# Altium PCB Template, LCO EuroCard 220mm.PCBDOC
Units mm, origin at the board's own origin, x right, y up, seen from the top; angles counter-clockwise.
Board outline 220 x 100 mm, 6 copper layers (TopLayer, MidLayer1, MidLayer2, InternalPlane1, InternalPlane2, BottomLayer); 7 components, 0 nets, 489 pads, 0 vias.
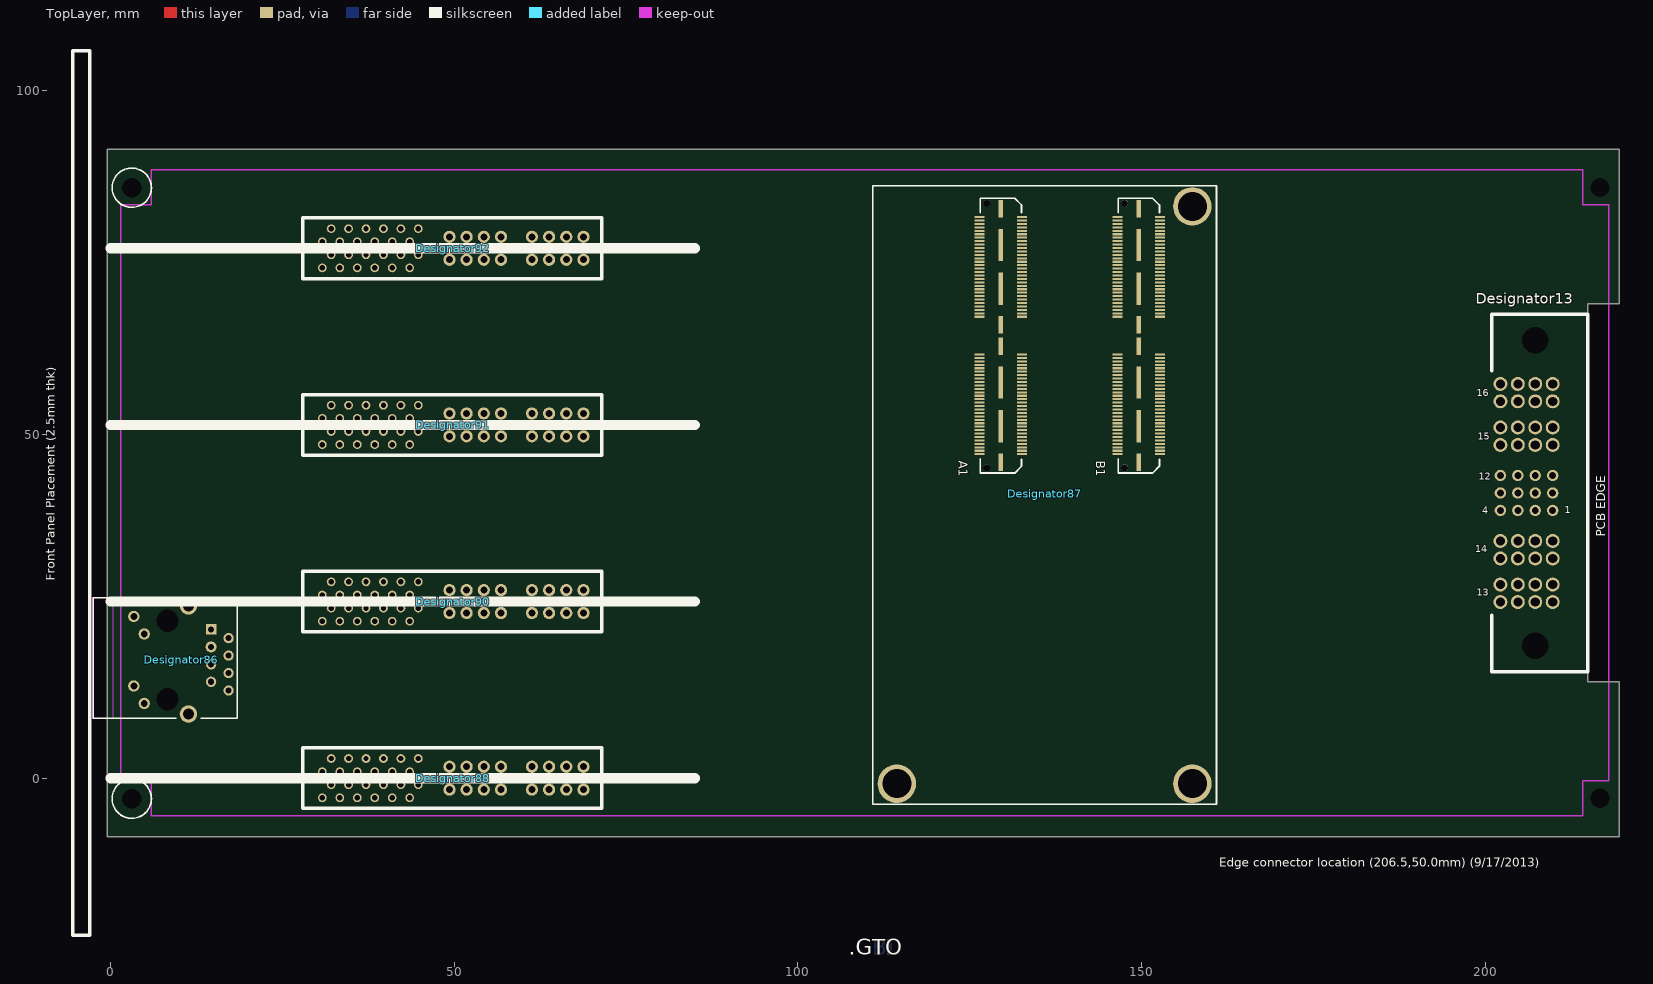
[diagram p0: TopLayer view]
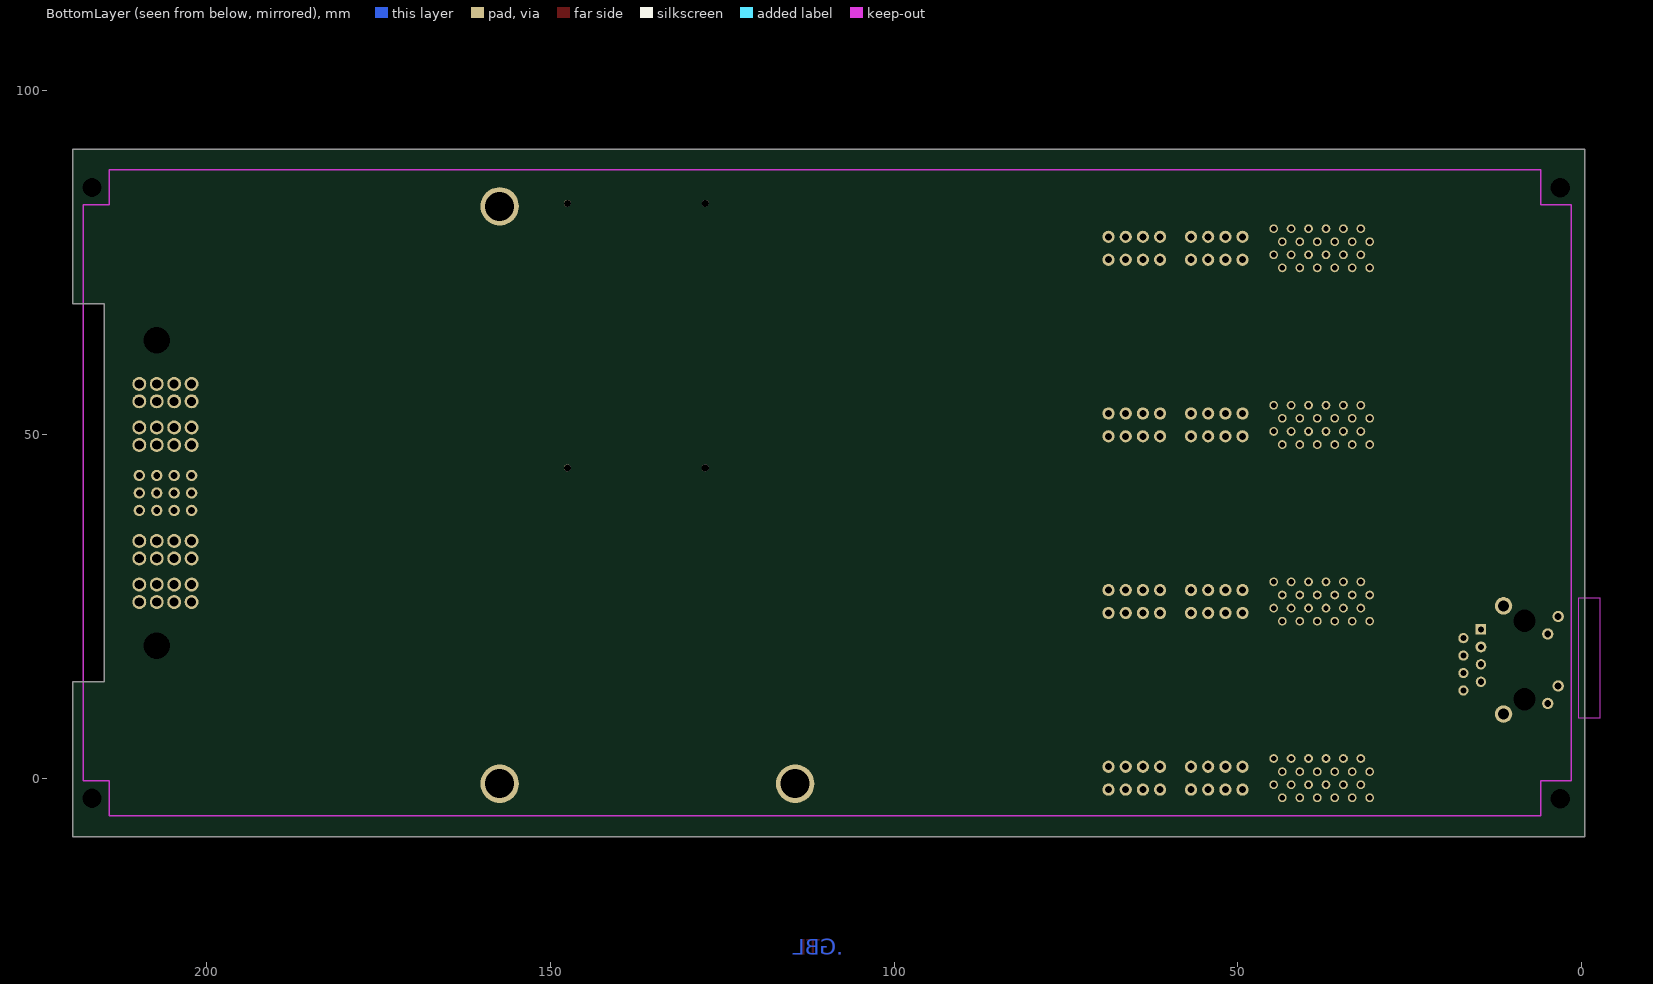
[diagram p1: BottomLayer view, seen from below]
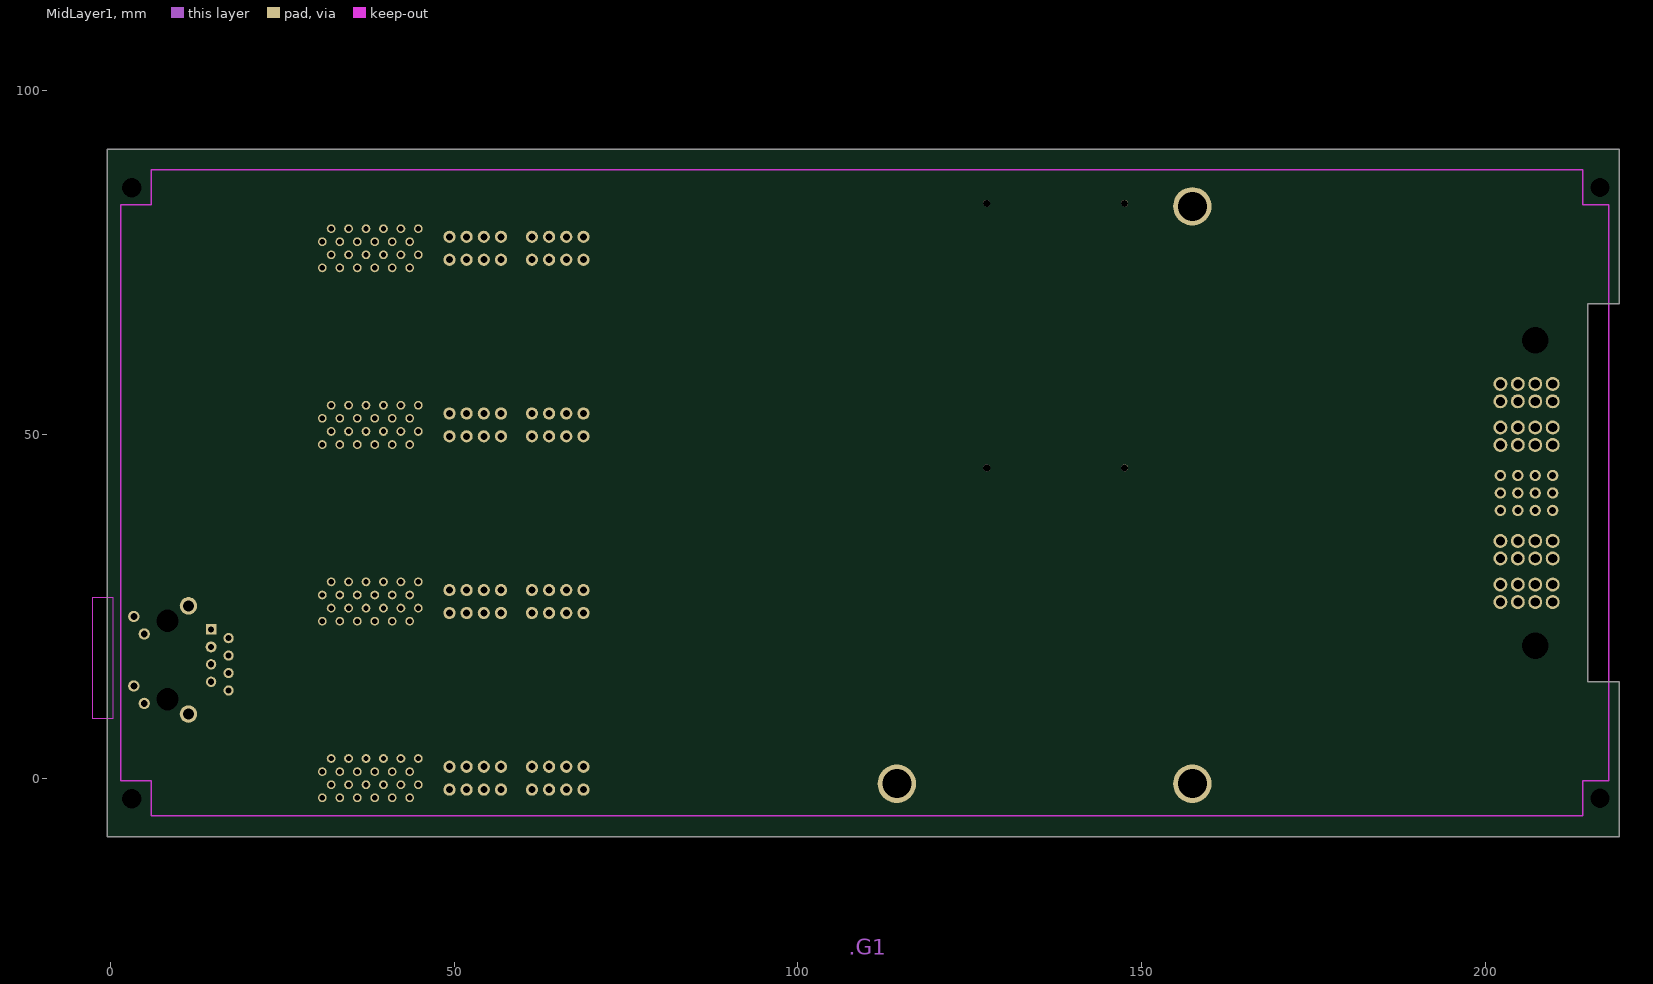
[diagram p2: MidLayer1]
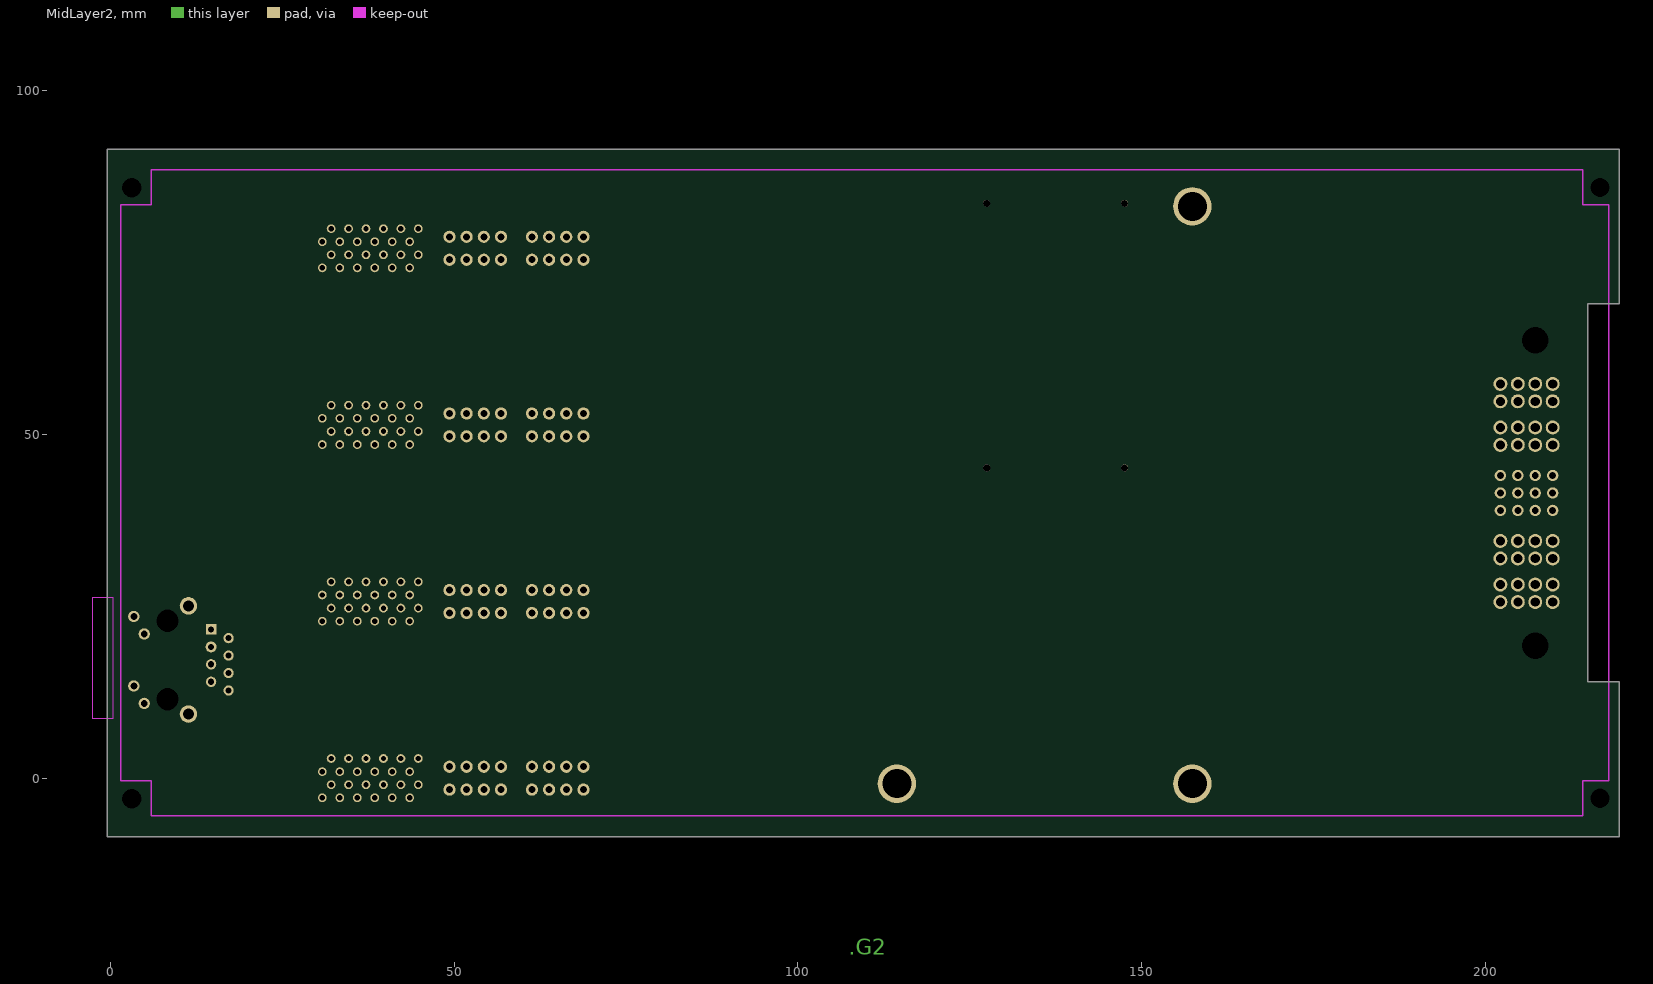
[diagram p3: MidLayer2]
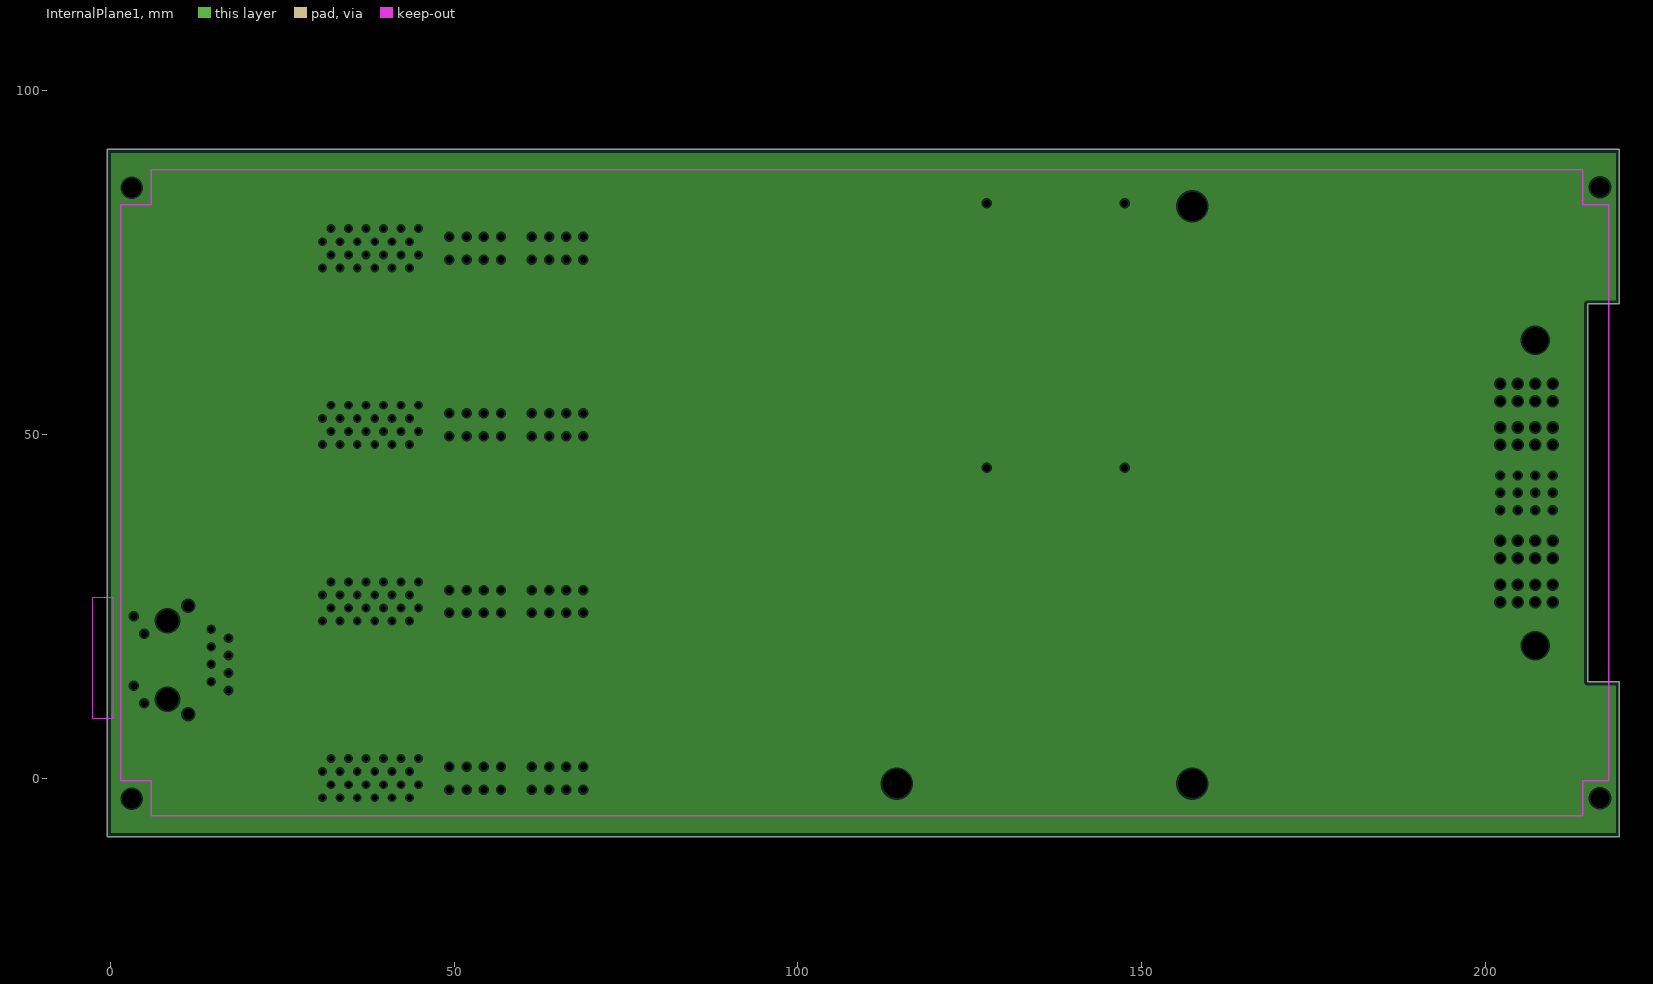
[diagram p4: InternalPlane1, clearances drawn from the general rule]
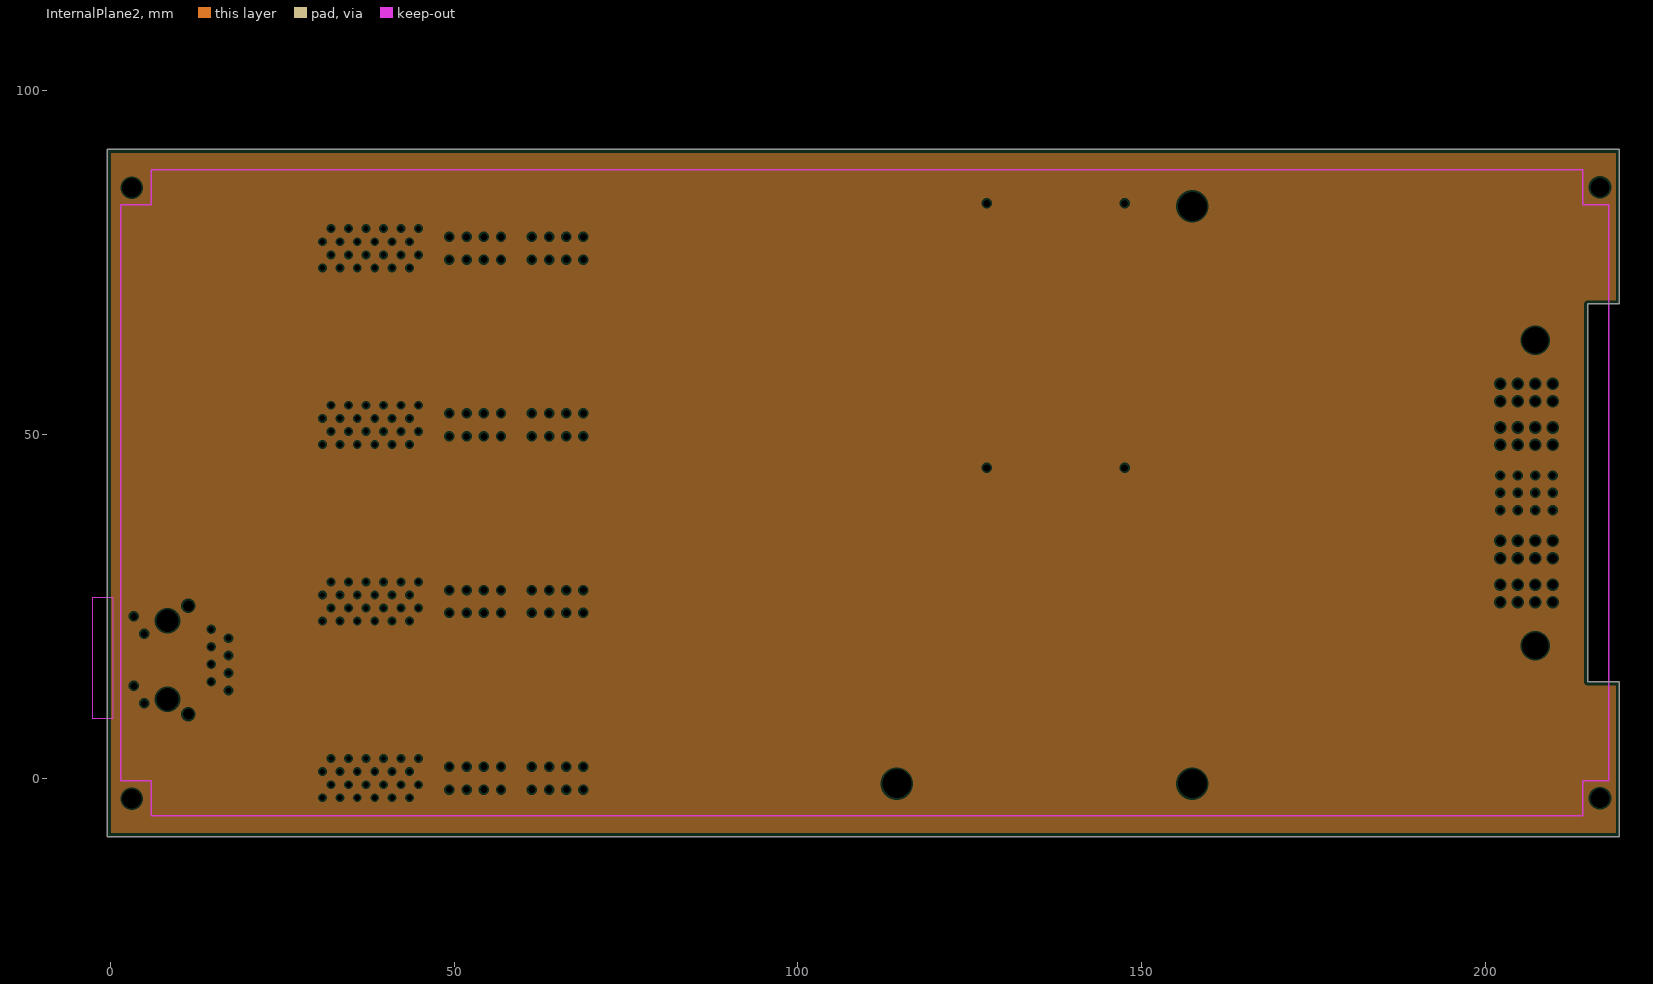
[diagram p5: InternalPlane2, clearances drawn from the general rule]

## Layer stack, top to bottom
TopLayer: signal copper 0.0356
Dielectric: core 0.32, FR-4, Dk 4.8
MidLayer1: signal copper 0.0356
Dielectric: prepreg 0.32, FR-4, Dk 4.8
MidLayer2: signal copper 0.0356
Dielectric: core 0.32, FR-4, Dk 4.8
InternalPlane1: plane copper 0.0356
Dielectric: prepreg 0.32, FR-4, Dk 4.8
InternalPlane2: plane copper 0.0356
Dielectric: core 0.32, FR-4, Dk 4.8
BottomLayer: signal copper 0.0356

## Board outline
-0.46,-8.5 -0.46,91.5 219.54,91.5 219.54,69 214.94,69 214.94,14 219.54,14 219.54,-8.5

## Design rules (kind name [scope] priority, off if disabled: settings)
Clearance [All] p1: gap=0.254
FabricationTestPointUsage TestPointUsage [All] p1: valid=0 allowmultiple=FALSE
FabricationTestpoint Testpoint [All] p1: side=3 testpointundercomponent=TRUE minsize=1.016 maxsize=2.54 preferedsize=1.524 minholesize=0.508 maxholesize=1.016 preferedholesize=0.813 testpointgrid=0.025 allowsidetop=TRUE allowsidebottom=TRUE usegrid=TRUE gridtolerance=0
PlaneClearance [All] p1: clearance=0.254
PlaneConnect [All] p1: planeconnectstyle=Relief reliefexpansion=0.508 reliefentries=4 reliefconductorwidth=0.254 reliefairgap=0.254
PolygonConnect [All] p1: connectstyle=Relief reliefconductorwidth=0.254 reliefentries=4 polygonreliefangle="90 Angle"
RoutingVias [All] p1: holewidth=0.711 width=1.27 viastyle="Through Hole" minholewidth=0.711 minwidth=1.27 maxholewidth=0.711 maxwidth=1.27
SilkscreenOverComponentPads [All] p1: minsilkscreentomaskgap=0.254
SolderMaskExpansion [All] p1: expansion=0.051
Width [All] p1: maxlimit=0.254 minlimit=0.254 preferedwidth=0.254
23 further rules are at their usual default settings.

## Components (designator, comment, footprint, x,y, rotation, side; value= is the part's Value field where it differs from the comment)
Designator13 "Comment" PETC-02-12-02-01-RA 206.04,41.5 r0 top
Designator86 "Comment" "RJ-45 W/MAGNETICS" 8.29,22.915 r90 top
Designator87 "Comment" "SuperFin Footprint" 114.42,83.19 r270 top
Designator88 "Comment" "MOLEX 46114 SERIES" 49.825,0 r180 top
Designator90 "Comment" "MOLEX 46114 SERIES" 49.825,25.7 r180 top
Designator91 "Comment" "MOLEX 46114 SERIES" 49.825,51.4 r180 top
Designator92 "Comment" "MOLEX 46114 SERIES" 49.825,77.1 r180 top

## Footprints (in the part's own frame and the unit in brackets; to place one, negate y for a bottom-side part, rotate by r counter-clockwise, add the part's x,y. Pads: shape width x height; smd on the part's side, far side on the other; paste and mask are expansions set on the pad)
"MOLEX 46114 SERIES" [mil] "VERT MOUNT PCB"
  round 50 hole 31 unplated paste-6 mask-3.5: 1(747.86,112.5) 2(697.86,37.5) 3(647.86,112.5) 4(597.86,37.5) 5(547.86,112.5) 6(497.86,37.5) 7(447.86,112.5) 8(397.86,37.5) 9(347.86,112.5) 10(297.86,37.5) 11(247.86,112.5) 12(197.86,37.5) 13(747.86,-37.5) 14(697.86,-112.5) 15(647.86,-37.5) 16(597.86,-112.5) 17(547.86,-37.5) 18(497.86,-112.5) 19(447.86,-37.5) 20(397.86,-112.5) 21(347.86,-37.5) 22(297.86,-112.5) 23(247.86,-37.5) 24(197.86,-112.5)
  round 70 hole 40 unplated paste-6 mask-3.5: P1(-275.42,65.5) P1(-176.99,65.5) P1(-78.57,65.5) P1(19.86,65.5) P2(-747.86,65.5) P2(-649.43,65.5) P2(-551.01,65.5) P2(-452.58,65.5) P3(-275.42,-65.6) P3(-176.99,-65.6) P3(-78.57,-65.6) P3(19.86,-65.6) P4(-747.86,-65.6) P4(-649.43,-65.6) P4(-551.01,-65.6) P4(-452.58,-65.6)
  silkscreen extent -851,-174 860,173
PETC-02-12-02-01-RA [mil] "Samtec Male Pins, PWR(4), Signal(12), Right Angle"
  round 59.06 hole 150 unplated: 0(50,-875) 0(50,875)
  round 65 hole 40: 1(150,-100) 2(50,-100) 3(-50,-100) 4(-150,-100) 5(150,0) 6(50,0) 7(-50,0) 8(-150,0) 9(150,100) 10(50,100) 11(-50,100) 12(-150,100)
  round 80 hole 52: 13(-150,-625) 13(-150,-525) 13(-50,-625) 13(-50,-525) 13(50,-625) 13(50,-525) 13(150,-625) 13(150,-525) 14(-150,-375) 14(-150,-275) 14(-50,-375) 14(-50,-275) 14(50,-375) 14(50,-275) 14(150,-375) 14(150,-275) 15(-150,275) 15(-150,375) 15(-50,275) 15(-50,375) 15(50,275) 15(50,375) 15(150,275) 15(150,375) 16(-150,525) 16(-150,625) 16(-50,525) 16(-50,625) 16(50,525) 16(50,625) 16(150,525) 16(150,625)
  silkscreen extent -200,-1025 350,1025
"RJ-45 W/MAGNETICS" [mm] "Conn, Pulse Eng p/n J0011D01BNL"
  rect 1.5x1.5 hole 0.9: 1(-1.27,-6.35)
  round 1.5 hole 0.9: 2(-2.54,-8.89) 4(-5.08,-8.89) 5(-6.35,-6.35) 6(-7.62,-8.89) 7(-8.89,-6.35) 8(-10.16,-8.89)
  round 1.6 hole 0.9: 3(-3.81,-6.35)
  round 1.651 hole 1.016: 9(0.61,4.902) 10(-1.93,3.378) 11(-9.5,4.902) 12(-12.04,3.378)
  round 2.54 hole 1.6: 13(2.159,-3.048) 14(-13.589,-3.048)
  round 2.95 hole 3.25 unplated: MH1(0,0) MH2(-11.43,0)
  KeepOutLayer region: -14.224,7.874 3.302,7.874 3.302,10.922 -14.224,10.922
  silkscreen extent -14.22,-10.16 3.3,10.79
"SuperFin Footprint" [mm] "SAMTEC QTH-060-01-L-D-A (x2)"
  round 5.6 hole 4.22: 0(0,43) 0(84,43) 0(84,0)
  round 1 hole 1.02 unplated: 0(38.04,33.15) 0(38.04,13.08) 1(-0.44,33.15) 1(-0.44,13.08)
  rect 0.3x1.45 smd paste+0 mask+0.05: A1(36.05,12.03) A2(36.05,18.21) A3(35.55,12.03) A4(35.55,18.21) A5(35.05,12.03) A6(35.05,18.21) A7(34.55,12.03) A8(34.55,18.21) A9(34.05,12.03) A10(34.05,18.21) A11(33.55,12.03) A12(33.55,18.21) A13(33.05,12.03) A14(33.05,18.21) A15(32.55,12.03) A16(32.55,18.21) A17(32.05,12.03) A18(32.05,18.21) A19(31.55,12.03) A20(31.55,18.21) A21(31.05,12.03) A22(31.05,18.21) A23(30.55,12.03) A24(30.55,18.21) A25(30.05,12.03) A26(30.05,18.21) A27(29.55,12.03) A28(29.55,18.21) A29(29.05,12.03) A30(29.05,18.21) A31(28.55,12.03) A32(28.55,18.21) A33(28.05,12.03) A34(28.05,18.21) A35(27.55,12.03) A36(27.55,18.21) A37(27.05,12.03) A38(27.05,18.21) A39(26.55,12.03) A40(26.55,18.21) A41(26.05,12.03) A42(26.05,18.21) A43(25.55,12.03) A44(25.55,18.21) A45(25.05,12.03) A46(25.05,18.21) A47(24.55,12.03) A48(24.55,18.21) A49(24.05,12.03) A50(24.05,18.21) A51(23.55,12.03) A52(23.55,18.21) A53(23.05,12.03) A54(23.05,18.21) A55(22.55,12.03) A56(22.55,18.21) A57(22.05,12.03) A58(22.05,18.21) A59(21.55,12.03) A60(21.55,18.21) A61(16.05,12.03) A62(16.05,18.21) A63(15.55,12.03) A64(15.55,18.21) A65(15.05,12.03) A66(15.05,18.21) A67(14.55,12.03) A68(14.55,18.21) A69(14.05,12.03) A70(14.05,18.21) A71(13.55,12.03) A72(13.55,18.21) A73(13.05,12.03) A74(13.05,18.21) A75(12.55,12.03) A76(12.55,18.21) A77(12.05,12.03) A78(12.05,18.21) A79(11.55,12.03) A80(11.55,18.21) A81(11.05,12.03) A82(11.05,18.21) A83(10.55,12.03) A84(10.55,18.21) A85(10.05,12.03) A86(10.05,18.21) A87(9.55,12.03) A88(9.55,18.21) A89(9.05,12.03) A90(9.05,18.21) A91(8.55,12.03) A92(8.55,18.21) A93(8.05,12.03) A94(8.05,18.21) A95(7.55,12.03) A96(7.55,18.21) A97(7.05,12.03) A98(7.05,18.21) A99(6.55,12.03) A100(6.55,18.21) A101(6.05,12.03) A102(6.05,18.21) A103(5.55,12.03) A104(5.55,18.21) A105(5.05,12.03) A106(5.05,18.21) A107(4.55,12.03) A108(4.55,18.21) A109(4.05,12.03) A110(4.05,18.21) A111(3.55,12.03) A112(3.55,18.21) A113(3.05,12.03) A114(3.05,18.21) A115(2.55,12.03) A116(2.55,18.21) A117(2.05,12.03) A118(2.05,18.21) A119(1.55,12.03) A120(1.55,18.21) B1(36.05,32.1) B2(36.05,38.28) B3(35.55,32.1) B4(35.55,38.28) B5(35.05,32.1) B6(35.05,38.28) B7(34.55,32.1) B8(34.55,38.28) B9(34.05,32.1) B10(34.05,38.28) B11(33.55,32.1) B12(33.55,38.28) B13(33.05,32.1) B14(33.05,38.28) B15(32.55,32.1) B16(32.55,38.28) B17(32.05,32.1) B18(32.05,38.28) B19(31.55,32.1) B20(31.55,38.28) B21(31.05,32.1) B22(31.05,38.28) B23(30.55,32.1) B24(30.55,38.28) B25(30.05,32.1) B26(30.05,38.28) B27(29.55,32.1) B28(29.55,38.28) B29(29.05,32.1) B30(29.05,38.28) B31(28.55,32.1) B32(28.55,38.28) B33(28.05,32.1) B34(28.05,38.28) B35(27.55,32.1) B36(27.55,38.28) B37(27.05,32.1) B38(27.05,38.28) B39(26.55,32.1) B40(26.55,38.28) B41(26.05,32.1) B42(26.05,38.28) B43(25.55,32.1) B44(25.55,38.28) B45(25.05,32.1) B46(25.05,38.28) B47(24.55,32.1) B48(24.55,38.28) B49(24.05,32.1) B50(24.05,38.28) B51(23.55,32.1) B52(23.55,38.28) B53(23.05,32.1) B54(23.05,38.28) B55(22.55,32.1) B56(22.55,38.28) B57(22.05,32.1) B58(22.05,38.28) B59(21.55,32.1) B60(21.55,38.28) B61(16.05,32.1) B62(16.05,38.28) B63(15.55,32.1) B64(15.55,38.28) B65(15.05,32.1) B66(15.05,38.28) B67(14.55,32.1) B68(14.55,38.28) B69(14.05,32.1) B70(14.05,38.28) B71(13.55,32.1) B72(13.55,38.28) B73(13.05,32.1) B74(13.05,38.28) B75(12.55,32.1) B76(12.55,38.28) B77(12.05,32.1) B78(12.05,38.28) B79(11.55,32.1) B80(11.55,38.28) B81(11.05,32.1) B82(11.05,38.28) B83(10.55,32.1) B84(10.55,38.28) B85(10.05,32.1) B86(10.05,38.28) B87(9.55,32.1) B88(9.55,38.28) B89(9.05,32.1) B90(9.05,38.28) B91(8.55,32.1) B92(8.55,38.28) B93(8.05,32.1) B94(8.05,38.28) B95(7.55,32.1) B96(7.55,38.28) B97(7.05,32.1) B98(7.05,38.28) B99(6.55,32.1) B100(6.55,38.28) B101(6.05,32.1) B102(6.05,38.28) B103(5.55,32.1) B104(5.55,38.28) B105(5.05,32.1) B106(5.05,38.28) B107(4.55,32.1) B108(4.55,38.28) B109(4.05,32.1) B110(4.05,38.28) B111(3.55,32.1) B112(3.55,38.28) B113(3.05,32.1) B114(3.05,38.28) B115(2.55,32.1) B116(2.55,38.28) B117(2.05,32.1) B118(2.05,38.28) B119(1.55,32.1) B120(1.55,38.28)
  rect 2.54x0.64 smd: A121(20.355,15.12) A121(37.245,15.12) A122(0.355,15.12) A122(17.245,15.12) B121(20.355,35.19) B121(37.245,35.19) B122(0.355,35.19) B122(17.245,35.19)
  rect 4.7x0.64 smd: A121(25.625,15.12) A121(31.975,15.12) A122(5.625,15.12) A122(11.975,15.12) B121(25.625,35.19) B121(31.975,35.19) B122(5.625,35.19) B122(11.975,35.19)
  silkscreen extent -3,-3.5 87,46.5

## Free pads (board coordinates)
  round 1.27 hole 2.794 unplated: 1(3.096,85.912) 2(3.096,-2.988) 2(216.735,-2.937) 2(216.735,85.963)

## Nets (pads, with @x,y where several pads share a name; then routed paths per layer and width w, separated by ;. In a path a pad name is that pad's centre, name@x,y a point inside that pad or via, vN(x,y) a via of type N, cw(c..) or ccw(c..) an arc to the next point about the centre after c; other vN are vias at no path point)
pads on no net: Designator13.0 Designator13.1 Designator13.2 Designator13.3 Designator13.4 Designator13.5 Designator13.6 Designator13.7 Designator13.8 Designator13.9 Designator13.10 Designator13.11 Designator13.12 Designator13.13 Designator13.14 Designator13.15 Designator13.16 Designator86.1 Designator86.2 Designator86.3 Designator86.4 Designator86.5 Designator86.6 Designator86.7 Designator86.8 Designator86.9 Designator86.10 Designator86.11 Designator86.12 Designator86.13 Designator86.14 Designator86.MH1 Designator86.MH2 Designator87.0 Designator87.1 Designator87.A1 Designator87.A2 Designator87.A3 Designator87.A4 Designator87.A5 Designator87.A6 Designator87.A7 Designator87.A8 Designator87.A9 Designator87.A10 Designator87.A11 Designator87.A12 Designator87.A13 Designator87.A14 Designator87.A15 Designator87.A16 Designator87.A17 Designator87.A18 Designator87.A19 Designator87.A20 Designator87.A21 Designator87.A22 Designator87.A23 Designator87.A24 Designator87.A25 Designator87.A26 Designator87.A27 Designator87.A28 Designator87.A29 Designator87.A30 Designator87.A31 Designator87.A32 Designator87.A33 Designator87.A34 Designator87.A35 Designator87.A36 Designator87.A37 Designator87.A38 Designator87.A39 Designator87.A40 Designator87.A41 Designator87.A42 Designator87.A43 Designator87.A44 Designator87.A45 Designator87.A46 Designator87.A47 Designator87.A48 Designator87.A49 Designator87.A50 Designator87.A51 Designator87.A52 Designator87.A53 Designator87.A54 Designator87.A55 Designator87.A56 Designator87.A57 Designator87.A58 Designator87.A59 Designator87.A60 Designator87.A61 Designator87.A62 Designator87.A63 Designator87.A64 Designator87.A65 Designator87.A66 Designator87.A67 Designator87.A68 Designator87.A69 Designator87.A70 Designator87.A71 Designator87.A72 Designator87.A73 Designator87.A74 Designator87.A75 Designator87.A76 Designator87.A77 Designator87.A78 Designator87.A79 Designator87.A80 Designator87.A81 Designator87.A82 Designator87.A83 Designator87.A84 Designator87.A85 Designator87.A86 Designator87.A87 Designator87.A88 Designator87.A89 Designator87.A90 Designator87.A91 Designator87.A92 Designator87.A93 Designator87.A94 Designator87.A95 Designator87.A96 Designator87.A97 Designator87.A98 Designator87.A99 Designator87.A100 Designator87.A101 Designator87.A102 Designator87.A103 Designator87.A104 Designator87.A105 Designator87.A106 Designator87.A107 Designator87.A108 Designator87.A109 Designator87.A110 Designator87.A111 Designator87.A112 Designator87.A113 Designator87.A114 Designator87.A115 Designator87.A116 Designator87.A117 Designator87.A118 Designator87.A119 Designator87.A120 Designator87.A121 Designator87.A122 Designator87.B1 Designator87.B2 Designator87.B3 Designator87.B4 Designator87.B5 Designator87.B6 Designator87.B7 Designator87.B8 Designator87.B9 Designator87.B10 Designator87.B11 Designator87.B12 Designator87.B13 Designator87.B14 Designator87.B15 Designator87.B16 Designator87.B17 Designator87.B18 Designator87.B19 Designator87.B20 Designator87.B21 Designator87.B22 Designator87.B23 Designator87.B24 Designator87.B25 Designator87.B26 Designator87.B27 Designator87.B28 Designator87.B29 Designator87.B30 Designator87.B31 Designator87.B32 Designator87.B33 Designator87.B34 Designator87.B35 Designator87.B36 Designator87.B37 Designator87.B38 Designator87.B39 Designator87.B40 Designator87.B41 Designator87.B42 Designator87.B43 Designator87.B44 Designator87.B45 Designator87.B46 Designator87.B47 Designator87.B48 Designator87.B49 Designator87.B50 Designator87.B51 Designator87.B52 Designator87.B53 Designator87.B54 Designator87.B55 Designator87.B56 Designator87.B57 Designator87.B58 Designator87.B59 Designator87.B60 Designator87.B61 Designator87.B62 Designator87.B63 Designator87.B64 Designator87.B65 Designator87.B66 Designator87.B67 Designator87.B68 Designator87.B69 Designator87.B70 Designator87.B71 Designator87.B72 Designator87.B73 Designator87.B74 Designator87.B75 Designator87.B76 Designator87.B77 Designator87.B78 Designator87.B79 Designator87.B80 Designator87.B81 Designator87.B82 Designator87.B83 Designator87.B84 Designator87.B85 Designator87.B86 Designator87.B87 Designator87.B88 Designator87.B89 Designator87.B90 Designator87.B91 Designator87.B92 Designator87.B93 Designator87.B94 Designator87.B95 Designator87.B96 Designator87.B97 Designator87.B98 Designator87.B99 Designator87.B100 Designator87.B101 Designator87.B102 Designator87.B103 Designator87.B104 Designator87.B105 Designator87.B106 Designator87.B107 Designator87.B108 Designator87.B109 Designator87.B110 Designator87.B111 Designator87.B112 Designator87.B113 Designator87.B114 Designator87.B115 Designator87.B116 Designator87.B117 Designator87.B118 Designator87.B119 Designator87.B120 Designator87.B121 Designator87.B122 Designator88.1 Designator88.2 Designator88.3 Designator88.4 Designator88.5 Designator88.6 Designator88.7 Designator88.8 Designator88.9 Designator88.10 Designator88.11 Designator88.12 Designator88.13 Designator88.14 Designator88.15 Designator88.16 Designator88.17 Designator88.18 Designator88.19 Designator88.20 Designator88.21 Designator88.22 Designator88.23 Designator88.24 Designator88.P1 Designator88.P2 Designator88.P3 Designator88.P4 Designator90.1 Designator90.2 Designator90.3 Designator90.4 Designator90.5 Designator90.6 Designator90.7 Designator90.8 Designator90.9 Designator90.10 Designator90.11 Designator90.12 Designator90.13 Designator90.14 Designator90.15 Designator90.16 Designator90.17 Designator90.18 Designator90.19 Designator90.20 Designator90.21 Designator90.22 Designator90.23 Designator90.24 Designator90.P1 Designator90.P2 Designator90.P3 Designator90.P4 Designator91.1 Designator91.2 Designator91.3 Designator91.4 Designator91.5 Designator91.6 Designator91.7 Designator91.8 Designator91.9 Designator91.10 Designator91.11 Designator91.12 Designator91.13 Designator91.14 Designator91.15 Designator91.16 Designator91.17 Designator91.18 Designator91.19 Designator91.20 Designator91.21 Designator91.22 Designator91.23 Designator91.24 Designator91.P1 Designator91.P2 Designator91.P3 Designator91.P4 Designator92.1 Designator92.2 Designator92.3 Designator92.4 Designator92.5 Designator92.6 Designator92.7 Designator92.8 Designator92.9 Designator92.10 Designator92.11 Designator92.12 Designator92.13 Designator92.14 Designator92.15 Designator92.16 Designator92.17 Designator92.18 Designator92.19 Designator92.20 Designator92.21 Designator92.22 Designator92.23 Designator92.24 Designator92.P1 Designator92.P2 Designator92.P3 Designator92.P4

## Polygon pours and split planes (outlines as drawn)
no net on InternalPlane1 (split plane): 219.03,69.51 214.94,69.51 214.84,69.501 214.745,69.472 214.656,69.424 214.579,69.361 214.516,69.284 214.468,69.195 214.439,69.1 214.43,69 214.43,14 214.439,13.9 214.468,13.805 214.516,13.716 214.579,13.639 214.656,13.576 214.745,13.528 214.84,13.499 214.94,13.49 219.03,13.49 219.03,-7.99 0.05,-7.99 0.05,90.99 219.03,90.99
no net on InternalPlane2 (split plane): 219.03,69.51 214.94,69.51 214.84,69.501 214.745,69.472 214.656,69.424 214.579,69.361 214.516,69.284 214.468,69.195 214.439,69.1 214.43,69 214.43,14 214.439,13.9 214.468,13.805 214.516,13.716 214.579,13.639 214.656,13.576 214.745,13.528 214.84,13.499 214.94,13.49 219.03,13.49 219.03,-7.99 0.05,-7.99 0.05,90.99 219.03,90.99

## Keep-outs
KeepOutLayer:
  lines w0.203: 1.47,-0.397 1.47,83.423 5.915,83.423 5.915,88.503 214.195,88.503 214.195,83.423 218.005,83.423 218.005,-0.397 214.195,-0.397 214.195,-5.477 5.915,-5.477 5.915,-0.397 1.47,-0.397

## Other copper
TopLayer:
  text ".GTL" at 107.414,-25.696 h2.29
MidLayer1:
  text ".G1" at 107.414,-25.696 h2.29
MidLayer2:
  text ".G2" at 107.414,-25.696 h2.29
BottomLayer:
  text ".GBL" at 107.414,-25.696 h2.29

## Silkscreen, mask and mechanical layers (free items; w line width, h text height)
TopOverlay:
  circle w0.254: c3.096,85.912 r2.857
  circle w0.254: c3.096,-2.988 r2.857
  lines w0.508: -5.5,-22.85 -5.5,105.85 -3,105.85 -3,-22.85 -5.5,-22.85
  lines w1.5: 0,25.7 85,25.7 ; 0,51.4 85,51.4 ; 0,77.1 85,77.1 ; 0,0 85,0 0,0
  text "Front Panel Placement (2.5mm thk)" at -8.09,28.7 h1.27 r90
  text "Edge connector location (206.5,50.0mm) (9/17/2013)" at 161.34,-12.9 h1.27
  text ".GTO" at 107.414,-25.696 h2.29
TopPaste:
  text ".GTP" at 107.414,-25.696 h2.29
BottomPaste:
  text ".GBP" at 107.414,-25.696 h2.29
TopSolder:
  text ".GTS" at 107.414,-25.696 h2.29
BottomSolder:
  text ".GBS" at 107.414,-25.696 h2.29
Mechanical1:
  the board outline again, w1

## Dimensions
-0.46,-8.5 to -0.46,91.5 on Mechanical2
-0.46,91.5 to 219.54,91.5 on Mechanical2

## Text inside footprints (layer, text, board x,y; h text height)
Designator13: TopOverlay "1" at 211.628,38.579 h1.02; TopOverlay "PCB EDGE" at 217.47,35.15 h1.27 r90; TopOverlay "13" at 198.801,26.514 h1.02; TopOverlay "16" at 198.801,55.597 h1.02; TopOverlay "4" at 199.563,38.452 h1.02; TopOverlay "12" at 199.055,43.405 h1.02; TopOverlay "14" at 198.547,32.864 h1.02; TopOverlay "15" at 198.928,49.247 h1.02
Designator87: TopOverlay "B1" at 143.42,46.19 h1.27 r270; TopOverlay "A1" at 123.42,46.19 h1.27 r270